# Altium PCB PCB_EMG_SN.PcbDoc
Units mm, origin at the board's own origin, x right, y up, seen from the top; angles counter-clockwise.
Board outline 44.83 x 25.53 mm, 2 copper layers (Top Layer, Bottom Layer); 67 components, 83 nets, 360 pads, 99 vias.
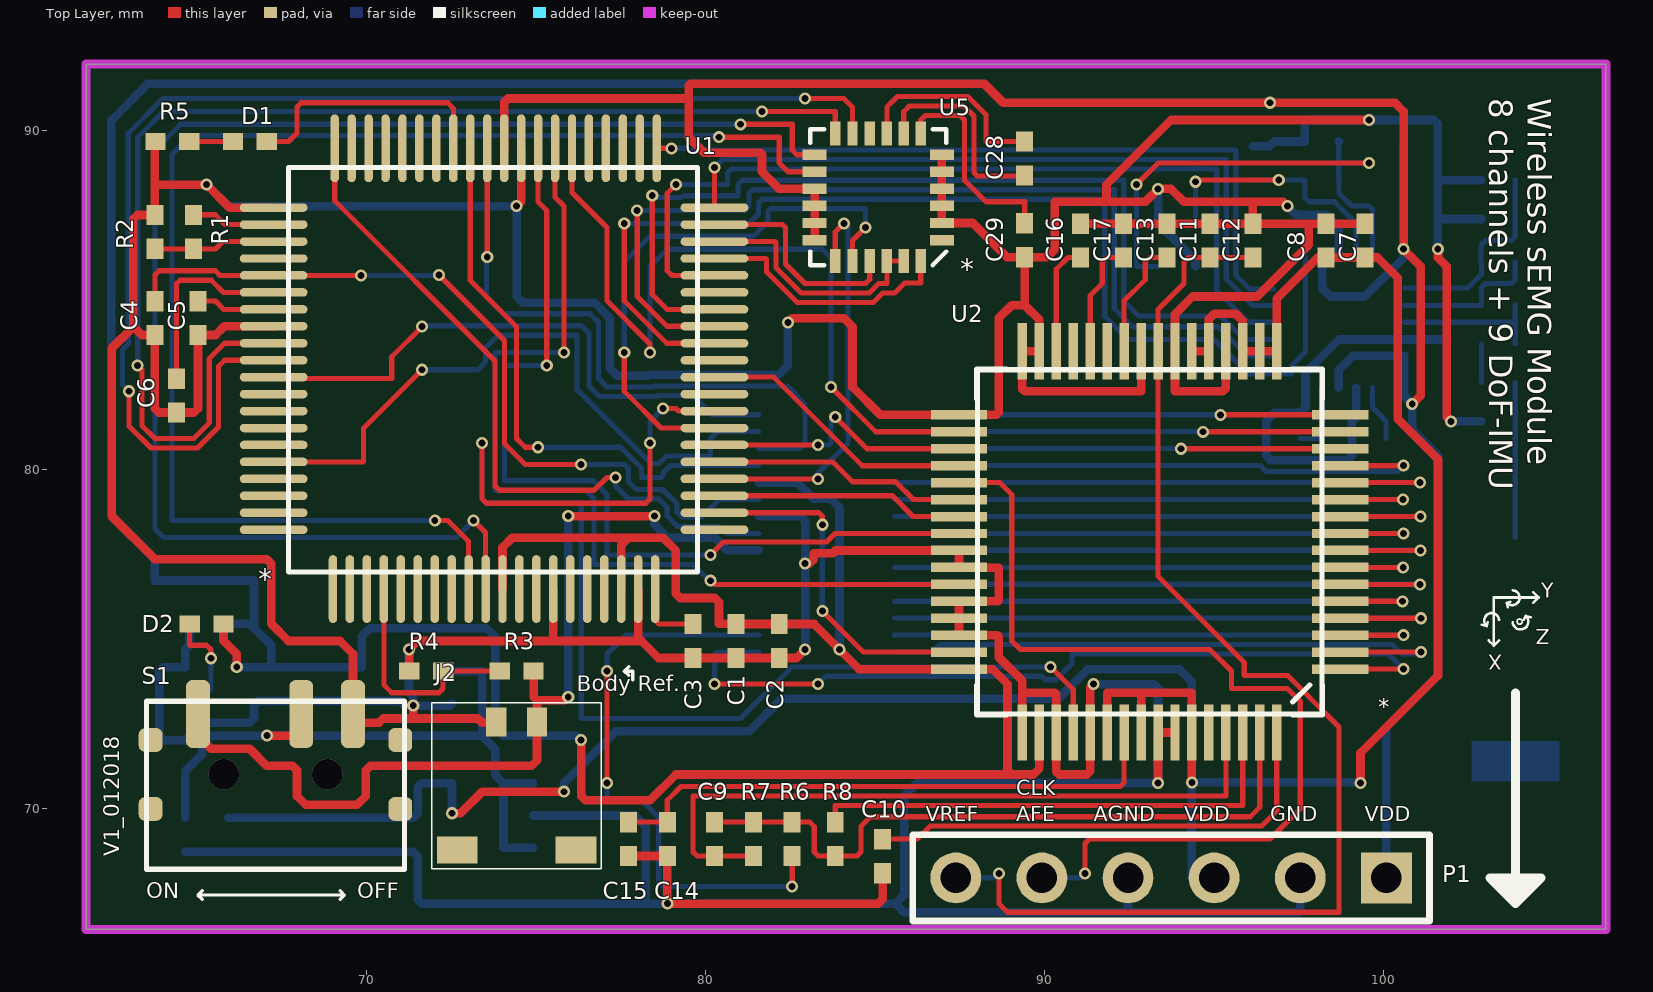
[diagram p0: Top Layer view]
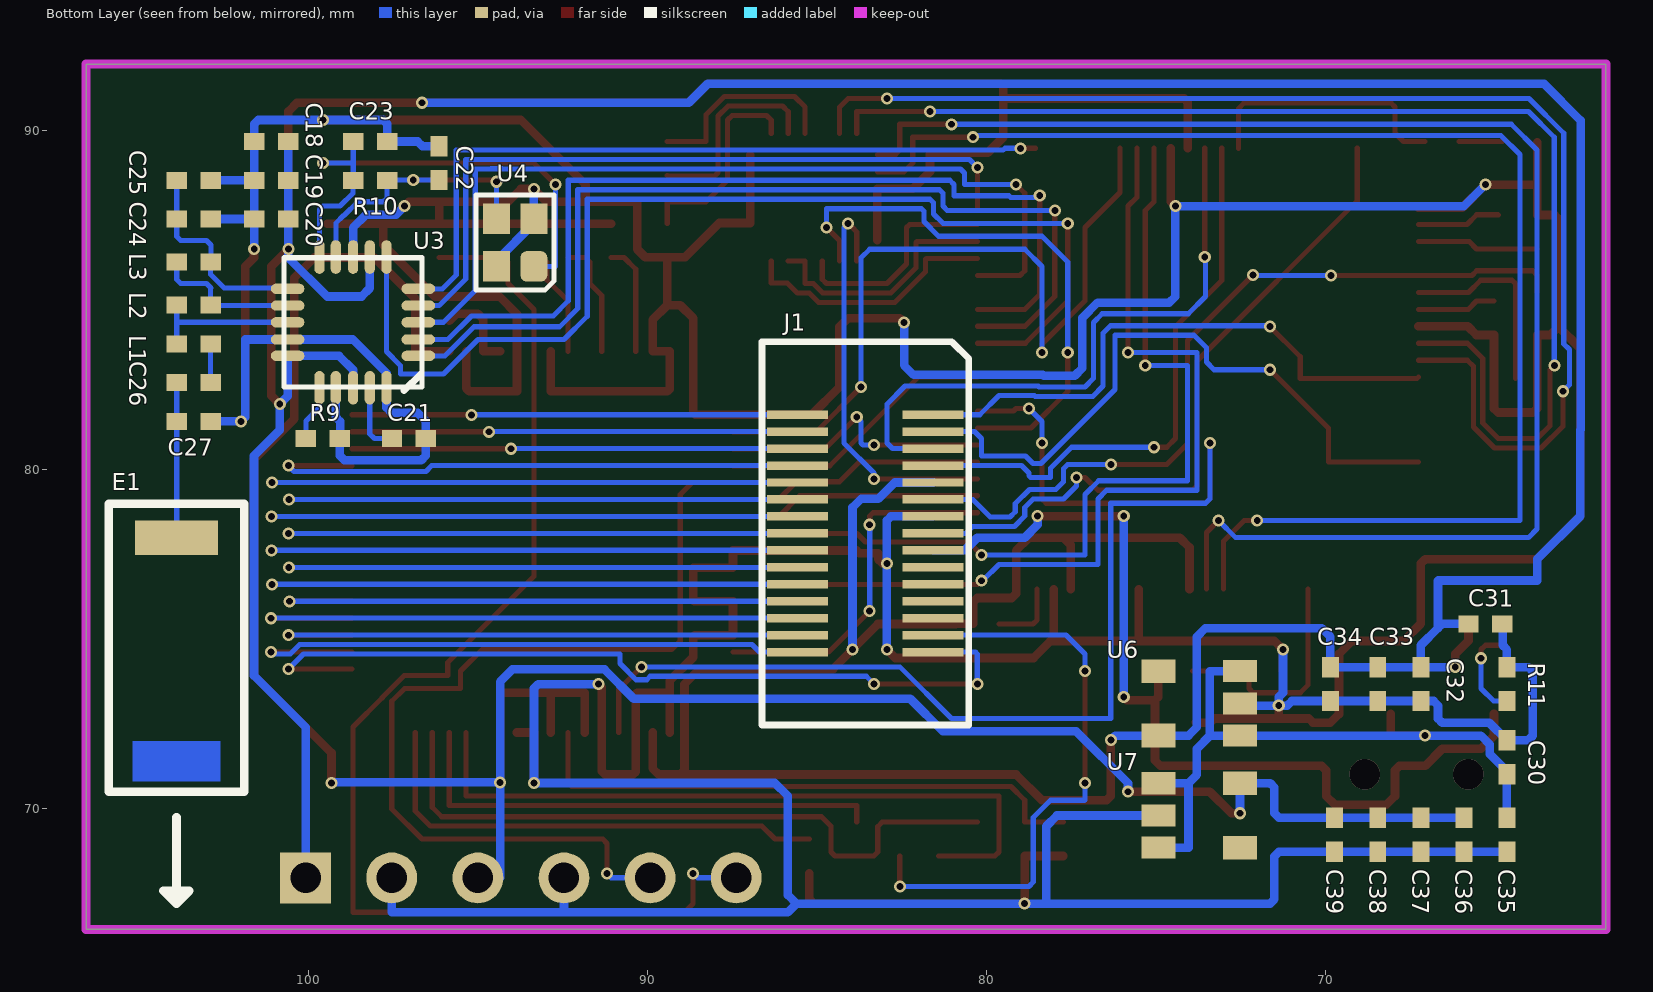
[diagram p1: Bottom Layer view, seen from below]

## Layer stack, top to bottom
Top Solder: solder mask 0.0102, Solder Resist, Dk 3.5
Top Layer: signal copper 0.0356
Dielectric 1: dielectric 0.32, FR-4, Dk 4.8
Bottom Layer: signal copper 0.0356
Bottom Solder: solder mask 0.0102, Solder Resist, Dk 3.5

## Board outline
61.722,66.421 61.722,91.948 106.553,91.948 106.553,66.421

## Design rules (kind name [scope] priority, off if disabled: settings)
Clearance [All] p1: gap=0.127
PolygonConnect [All] p1: connectstyle=Relief reliefconductorwidth=0.254 reliefentries=4 polygonreliefangle="90 Angle" airgapwidth=0.254
RoutingVias [All] p1: holewidth=0.203 width=0.356 viastyle="Through Hole" minholewidth=0.203 minwidth=0.356 maxholewidth=0.203 maxwidth=0.356
SolderMaskExpansion [All] p1: expansion=0.102
Width [All] p1: maxlimit=0.254 minlimit=0.152 preferedwidth=0.152
30 further rules are at their usual default settings.

## Classes and differential pairs
component class AFE_ADS1298: C7 C8 C9 C10 C11 C12 C13 C14 C15 C16 C17 P1 R6 R7 R8 U2
component class LSM9DS0: C28 C29 U5
component class MCU_MSP430F5529IPN: C1 C2 C3 C4 C5 C6 D1 J1 R1 R2 R3 R4 R5 U1
component class nRF24L01: C18 C19 C20 C21 C22 C23 C24 C25 C26 C27 E1 L1 L2 L3 R9 R10 U3 U4
component class PMU: C30 C31 C32 C33 C34 C35 C36 C37 C38 C39 D2 J2 R11 S1 U6 U7

## Components (designator, comment, footprint, x,y, rotation, side; value= is the part's Value field where it differs from the comment)
C1 "Cap Semi" 0402 80.899,74.93 r270 top
C2 "Cap Semi" 0402 82.169,74.93 r270 top
C3 "Cap Semi" 0402 79.629,74.93 r270 top
C4 "Cap Semi" 0402 63.754,84.455 r270 top
C5 "Cap Semi" 0402 65.024,84.455 r90 top
C6 "Cap Semi" 0402 64.389,82.169 r90 top
C7 "Cap" 0402 99.441,86.741 r270 top
C8 "Cap" 0402 98.298,86.741 r270 top
C9 "Cap" 0402 80.264,69.088 r90 top
C10 "Cap" 0402 85.217,68.58 r270 top
C11 "Cap" 0402 94.869,86.741 r270 top
C12 "" 0402 96.139,86.741 r270 top
C13 "Cap" 0402 93.599,86.741 r90 top
C14 "Cap" 0402 78.867,69.088 r270 top
C15 "Cap" 0402 77.724,69.088 r270 top
C16 "Cap" 0402 91.059,86.741 r90 top
C17 "Cap" 0402 92.329,86.741 r90 top
C18 "" 0402 101.092,89.662 r180 bottom
C19 "" 0402 101.092,88.519 r180 bottom
C20 "" 0402 101.092,87.376 r180 bottom
C21 "" 0402 97.028,80.899 r0 bottom
C22 "" 0402 96.139,89.027 r270 bottom
C23 "" 0402 98.171,89.662 r0 bottom
C24 "" 0402 103.378,87.376 r0 bottom
C25 "" 0402 103.378,88.519 r0 bottom
C26 "" 0402 103.378,82.55 r180 bottom
C27 "" 0402 103.378,81.407 r180 bottom
C28 "Cap Semi" 0402 89.408,89.162 r270 top
C29 "Cap Semi" 0402 89.408,86.749 r90 top
C30 "Cap Semi" 0402 64.643,71.501 r270 bottom
C31 "Cap Semi" 0402 65.278,75.438 r0 bottom
C32 "Cap Semi" 0402 67.183,73.66 r90 bottom
C33 "Cap Semi" 0402 68.453,73.66 r90 bottom
C34 "Cap Semi" 0402 69.85,73.66 r90 bottom
C35 "Cap Semi" 0402 64.643,69.215 r90 bottom
C36 "Cap Semi" 0402 65.913,69.215 r90 bottom
C37 "Cap Semi" 0402 67.183,69.215 r90 bottom
C38 "Cap Semi" 0402 68.453,69.215 r90 bottom
C39 "Cap Semi" 0402 69.723,69.215 r90 bottom
D1 "" 0402 66.556,89.662 r180 top
D2 "" 0402 65.278,75.438 r180 top
E1 "" ANT-2.45-CHP-B 103.886,77.978 r270 bottom
J1 "PLUG" "Molex 0529910308" 83.566,78.105 r270 bottom
J2 "WM4459CT-ND" WM4459CT-ND 74.422,70.485 r180 top
L1 "" 0402 103.378,83.693 r180 bottom
L2 "" 0402 103.378,84.836 r0 bottom
L3 "" 0402 103.378,86.106 r180 bottom
P1 "Header 6" HDR1X6 100.076,67.945 r180 top
R1 "" 0402 64.897,86.995 r90 top
R2 "" 0402 63.754,86.995 r90 top
R3 "" 0402 74.422,74.041 r0 top
R4 "" 0402 71.755,74.041 r0 top
R5 "" 0402 64.27,89.662 r180 top
R6 "Res1" 0402 82.55,69.088 r270 top
R7 "Res1" 0402 81.407,69.088 r270 top
R8 "Res1" 0402 83.82,69.088 r270 top
R9 "" 0402 99.568,80.899 r0 bottom
R10 "" 0402 98.171,88.519 r180 bottom
R11 "" 0402 64.643,73.66 r90 bottom
S1 "SWITCH" CUS-12B 67.31,68.199 r0 top
U1 "MSP430F5529" 80-LQFP 79.756,76.962 r90 top
U2 "ADS1298TQFP" 64TQFP 93.091,77.851 r180 top
U3 "nRF24L01p" Component_nRF 98.679,84.328 r90 bottom
U4 "16MHz XTAL" 8Y-16.000MAAV-T 93.345,85.979 r90 bottom
U5 "Component_1" PCBComponent_1 85.09,88.019 r90 top
U6 "Reg 3.3V" TSOP-5ll 74.922,74.041 r270 bottom
U7 "Reg 3.3V" TSOP-5ll 72.517,68.834 r90 bottom

## Footprints (in the part's own frame and the unit in brackets; to place one, negate y for a bottom-side part, rotate by r counter-clockwise, add the part's x,y. Pads: shape width x height; smd on the part's side, far side on the other; paste and mask are expansions set on the pad)
8Y-16.000MAAV-T [mm] "SMD Crystal"
  rrect50% 0.9x0.8 smd: 1(0,0)
  rect 0.9x0.8 smd: 2(1.4,0) 3(1.4,1.1) 4(0,1.1)
  silkscreen extent -0.7,-0.6 2.1,1.7
64TQFP [mil] "ADS129X-4-6-8"
  rect 65.5x11 smd: 1(-221.25,147.64) 2(-221.25,127.95) 3(-221.25,108.27) 4(-221.25,88.58) 5(-221.25,68.9) 6(-221.25,49.21) 7(-221.25,29.53) 8(-221.25,9.84) 9(-221.25,-9.84) 10(-221.25,-29.53) 11(-221.25,-49.21) 12(-221.25,-68.9) 13(-221.25,-88.58) 14(-221.25,-108.27) 15(-221.25,-127.95) 16(-221.25,-147.64) 33(221.25,-147.64) 34(221.25,-127.95) 35(221.25,-108.27) 36(221.25,-88.58) 37(221.25,-68.9) 38(221.25,-49.21) 39(221.25,-29.53) 40(221.25,-9.84) 41(221.25,9.84) 42(221.25,29.53) 43(221.25,49.21) 44(221.25,68.9) 45(221.25,88.58) 46(221.25,108.27) 47(221.25,127.95) 48(221.25,147.64)
  rect 11x65.5 smd: 17(-147.64,-221.25) 18(-127.95,-221.25) 19(-108.27,-221.25) 20(-88.58,-221.25) 21(-68.9,-221.25) 22(-49.21,-221.25) 23(-29.53,-221.25) 24(-9.84,-221.25) 25(9.84,-221.25) 26(29.53,-221.25) 27(49.21,-221.25) 28(68.9,-221.25) 29(88.58,-221.25) 30(108.27,-221.25) 31(127.95,-221.25) 32(147.64,-221.25) 49(147.64,221.25) 50(127.95,221.25) 51(108.27,221.25) 52(88.58,221.25) 53(68.9,221.25) 54(49.21,221.25) 55(29.53,221.25) 56(9.84,221.25) 57(-9.84,221.25) 58(-29.53,221.25) 59(-49.21,221.25) 60(-68.9,221.25) 61(-88.58,221.25) 62(-108.27,221.25) 63(-127.95,221.25) 64(-147.64,221.25)
  silkscreen extent -201,-201 201,201, body extent -236,-236 236,236, height 43
80-LQFP [mm] "80-LQFP (12x12)"
  oval 2x0.25 smd: 1(-0.5,10.75) 2(-0.5,10.25) 3(-0.5,9.75) 4(-0.5,9.25) 5(-0.5,8.75) 6(-0.5,8.25) 7(-0.5,7.75) 8(-0.5,7.25) 9(-0.5,6.75) 10(-0.5,6.25) 11(-0.5,5.75) 12(-0.5,5.25) 13(-0.5,4.75) 14(-0.5,4.25) 15(-0.5,3.75) 16(-0.5,3.25) 17(-0.5,2.75) 18(-0.5,2.25) 19(-0.5,1.75) 20(-0.5,1.25) 41(12.5,1.2) 42(12.5,1.7) 43(12.5,2.2) 44(12.5,2.7) 45(12.5,3.2) 46(12.5,3.7) 47(12.5,4.2) 48(12.5,4.7) 49(12.5,5.2) 50(12.5,5.7) 51(12.5,6.2) 52(12.5,6.7) 53(12.5,7.2) 54(12.5,7.7) 55(12.5,8.2) 56(12.5,8.7) 57(12.5,9.2) 58(12.5,9.7) 59(12.5,10.2) 60(12.5,10.7)
  oval 0.25x2 smd: 21(1.25,-0.5) 22(1.75,-0.5) 23(2.25,-0.5) 24(2.75,-0.5) 25(3.25,-0.5) 26(3.75,-0.5) 27(4.25,-0.5) 28(4.75,-0.5) 29(5.25,-0.5) 30(5.75,-0.5) 31(6.25,-0.5) 32(6.75,-0.5) 33(7.25,-0.5) 34(7.75,-0.5) 35(8.25,-0.5) 36(8.75,-0.5) 37(9.25,-0.5) 38(9.75,-0.5) 39(10.25,-0.5) 40(10.75,-0.5) 61(10.75,12.5) 62(10.25,12.5) 63(9.75,12.5) 64(9.25,12.5) 65(8.75,12.5) 66(8.25,12.5) 67(7.75,12.5) 68(7.25,12.5) 69(6.75,12.5) 70(6.25,12.5) 71(5.75,12.5) 72(5.25,12.5) 73(4.75,12.5) 74(4.25,12.5) 75(3.75,12.5) 76(3.25,12.5) 77(2.75,12.5) 78(2.25,12.5) 79(1.75,12.5) 80(1.25,12.5)
  body extent -0.02,0.03 11.94,11.94, height 1
0402 [mm] "Chip Capacitor, Body 1.0x0.5mm, IPC High Density"
  rect 0.6x0.5 smd: 1(-0.5,0) 2(0.5,0)
  body extent -0.55,-0.3 0.55,0.3, height 1.3
ANT-2.45-CHP-B [mm] "2.4 GHz Chip Anetnna"
  rect 1.016x2.45 smd: 1(0,0)
  Top Layer region: 5.999,1.3 7.199,1.3 7.199,-1.3 5.999,-1.3
  silkscreen extent -1,-2 7.5,2
Component_nRF [mil]
  rrect100% 12x39 smd: 1(-38.9,-75.9) 2(-19.9,-75.9) 3(0.1,-75.9) 4(19.51,-75.9) 5(38.93,-75.9) 11(38.93,75.9) 12(19.51,75.9) 13(0.1,75.9) 14(-19.9,75.9) 15(-38.9,75.9)
  rrect100% 39x12 smd: 6(75.9,-38.93) 7(75.9,-19.51) 8(75.9,-0.1) 9(75.9,19.9) 10(75.9,38.9) 16(-75.9,38.9) 17(-75.9,19.9) 18(-75.9,-0.1) 19(-75.9,-19.52) 20(-75.9,-38.93)
  silkscreen extent -79,-79 -60,-59, body extent -75,-76 75,74, height 1
CUS-12B [mm]
  rrect50% 0.7x2 smd: 1(-2.286,4.578) 2(0.762,4.578) 3(2.286,4.578)
  rrect50% 0.7x0.7 smd: ""(-3.683,1.778) ""(-3.683,3.81) ""(3.683,1.778) ""(3.683,3.81)
  body extent -3.85,0 3.85,5, height 1.4
HDR1X6 [mm] "Connector; Header; 6 Position"
  rect 1.5x1.5 hole 0.9: 1(0,0)
  round 1.5 hole 0.9: 2(2.54,0) 3(5.08,0) 4(7.62,0) 5(10.16,0) 6(12.7,0)
  silkscreen extent -1.27,-1.27 13.97,1.27
"Molex 0529910308" [mm]
  rect 0.25x1.8 smd: 1(-3.5,2) 2(-3.5,-2) 3(-3,2) 4(-3,-2) 5(-2.5,2) 6(-2.5,-2) 7(-2,2) 8(-2,-2) 9(-1.5,2) 10(-1.5,-2) 11(-1,2) 12(-1,-2) 13(-0.5,2) 14(-0.5,-2) 15(0,2) 16(0,-2) 17(0.5,2) 18(0.5,-2) 19(1,2) 20(1,-2) 21(1.5,2) 22(1.5,-2) 23(2,2) 24(2,-2) 25(2.5,2) 26(2.5,-2) 27(3,2) 28(3,-2) 29(3.5,2) 30(3.5,-2)
  silkscreen extent -5.65,-3.05 5.65,3.05, body extent -5.65,-2.7 5.65,2.7, height 2.33
PCBComponent_1 [mil]
  rect 12x28 smd: 1(-49.91,-73.91) 2(-29.91,-73.91) 3(-9.91,-73.91) 4(9.93,-73.91) 5(29.62,-73.91) 6(49.3,-73.91) 13(49.3,73.91) 14(29.62,73.91) 15(9.93,73.91) 16(-9.91,73.91) 17(-29.91,73.91) 18(-49.91,73.91)
  rect 28x12 smd: 7(73.91,-49.3) 8(73.91,-29.62) 9(73.91,-9.93) 10(73.91,9.91) 11(73.91,29.91) 12(73.91,49.91) 19(-73.91,49.91) 20(-73.91,29.91) 21(-73.91,9.91) 22(-73.91,-9.93) 23(-73.91,-29.62) 24(-73.91,-49.3)
  silkscreen extent -79,-79 79,79, body extent -85,-85 75,85, height 1
TSOP-5ll [mm] "TSOP-5 package"
  rect 0.65x1 smd: 1(1.9,2.4) 2(0.95,2.4) 3(0,2.4)
  rect 0.7x1 smd: 4(0,0) 5(1.9,0)
WM4459CT-ND [mm] "Holder"
  rect 0.6x0.85 smd mask+0.08: 1(-0.6,-2.052) 2(0.6,-2.052)
  rect 1.2x0.8 smd mask+0.08: ""(-1.75,1.723) ""(1.75,1.723)
  silkscreen extent -2.5,-2.63 2.5,2.27, body extent -2.1,-2.28 2.1,2.25, height 1.45

## Part data
C1 C2 C3 C4 C5 C6 C28 C29 C30 C31 C32 C33 C34 C35 C36 C37 C38 C39: "Capacitor (Semiconductor SIM Model)"
C7 C8 C9 C10 C11 C13 C14 C15 C16 C17: "Capacitor"
C12 C18 C19 C20 C21 C22 C23 C24 C25 C26 C27: library part "Cap Semi", "Capacitor (Semiconductor SIM Model)"
D1 D2: library part LED3, "Typical BLUE SiC LED"
E1: library part Antenna, "Generic Antenna"
J1: library part "Molex 529910308"
L1 L2 L3: library part Inductor, "Inductor"
P1: "Header, 6-Pin"
R1 R2 R3 R4 R5 R9 R10 R11: library part "Res Semi", "Semiconductor Resistor"
R6 R7 R8: "Resistor"
S1: library part Component_1
U1: "IC MCU 16BIT 128KB FLASH 80LQFP"
U2: library part ADS1298_PAG_64, "Imported"
U3: library part Component_nRF
U4: library part 8Y-16.000MAAV-T, "SMD 16 MHz XTAL"
U6 U7: library part NCP603SN330T1G, "IC REG LDO 3.3V 0.3A 5TSOP"

## Via types
v1: diameter 0.356, hole 0.203, Top Layer to Bottom Layer, 97 vias
v2: diameter 0.9, hole 0.9, Top Layer to Bottom Layer, 2 vias

## Nets (pads, with @x,y where several pads share a name; then routed paths per layer and width w, separated by ;. In a path a pad name is that pad's centre, name@x,y a point inside that pad or via, vN(x,y) a via of type N, cw(c..) or ccw(c..) an arc to the next point about the centre after c; other vN are vias at no path point)
5V: C4.1 J1.11 U1.65 | length 23.7
  Top Layer w0.152: C4.1@63.754,85.209 63.754,85.725 63.881,85.852 65.532,85.852 65.672,85.712 U1.65 v1(69.837,85.712) ; v1(72.136,85.725) 74.066,83.795 74.066,80.747 74.676,80.137 v1(76.327,80.137)
  Bottom Layer w0.152: v1(69.837,85.712) v1@72.123,85.712 ; v1(76.327,80.137) 77.597,80.137 77.724,80.01 77.724,79.629 77.953,79.4 78.729,79.4 79.146,78.983 79.146,78.74 79.299,78.588 79.883,78.588 80.4,79.105 J1.11
AGND: C1.2 C2.2 C3.2 C4.2 C5.1 C6.1 C7.1 C8.1 C10.2 C11.1 C12.1 C13.2 C14.2 C15.2 C16.2 C17.2 C18.1 C19.1 C20.1 C21.1 C22.1 C23.1 C24.1 C25.1 C27.2 C29.1 C30.1 C31.1 C32.1 C33.1 C34.1 C35.1 C36.1 C37.1 C38.1 C39.1 J1.13 J2.2 P1.2 P1.4 R2.2 R4.1 R5.2 R9.1 R11.2 S1.3 U1.14 U1.19 U1.49 U1.61 U1.68 U2.20 U2.23 U2.25 U2.31 U2.32 U2.33 U2.41 U2.42 U2.44 U2.45 U2.46 U2.49 U2.51 U2.53 U2.57 U2.58 U3.8 U3.14 U3.17 U3.20 U4.2 U4.4 U5.2 U5.3 U5.4 U5.5 U5.6 U6.2 U7.2 | length 295.8
  Top Layer w0.254: R5.2@63.754,89.646 63.754,88.392 ; U1.68 65.797,84.212 65.54,83.955 C5.1 65.024,81.788 64.905,81.669 C6.1 63.873,81.669 63.754,81.788 C4.2 63.365,83.955 63.119,84.201 ; U1.61 65.958,87.712 v1(65.278,88.392) 63.754,88.392 ; R4.1 71.255,74.684 71.501,74.93 77.978,74.93 ; v1(71.374,73.025) 71.374,72.644 ; J2.2 73.802,72.517 73.406,72.517 73.279,72.644 71.374,72.644 ; v1(74.422,87.757) 74.556,87.891 U1.49 ; 75.506,74.93 U1.14 ; C15.2 C14.2 v1@78.867,67.31 ; U1.19 78.006,74.958 77.978,74.93 ; v1@78.994,67.183 85.09,67.183 85.217,67.31 C10.2 ; v1(82.423,84.328) 82.55,84.455 84.074,84.455 84.328,84.201 84.328,82.423 85.15,81.601 U2.33 88.579,81.601 88.646,81.668 88.646,84.455 89.027,84.836 89.408,84.836 ; v1(82.931,74.676) 82.685,74.43 C2.2 C1.2 C3.2 78.605,74.43 78.105,74.93 77.978,74.93 ; v1(82.931,77.216) 83.058,77.216 83.185,77.343 83.185,77.521 83.744,77.521 83.824,77.601 U2.41 U2.42 87.483,77.089 88.646,77.089 88.646,76.129 88.618,76.101 U2.44 U2.45 U2.46 88.602,75.101 88.646,75.057 88.646,74.453 89.341,73.758 89.341,73.339 ; U5.6 U5.5 U5.4 U5.3 U5.2 87.874,87.259 88.884,86.249 C29.1 ; U2.49 89.341,73.339 ; C16.2 C17.2 C13.2 C12.1 ; v1(91.44,73.66) 91.341,73.561 U2.53 91.341,71.092 91.242,70.993 90.424,70.993 90.341,71.076 U2.51 90.341,73.362 90.297,73.406 89.408,73.406 89.341,73.339 ; U2.25 92.841,82.296 89.408,82.296 89.341,82.363 U2.32 U2.31 89.841,84.403 89.408,84.836 ; v1(93.341,70.743) U2.57 U2.58 ; U2.20 95.341,82.387 95.25,82.296 93.841,82.296 U2.23 93.841,84.57 94.361,85.09 96.266,85.09 97.79,86.614 97.79,87.241 ; 96.139,87.884 C12.1 ; v1(97.155,87.757) 97.028,87.884 94.107,87.884 93.726,88.265 v1(93.345,88.265) 92.964,87.884 91.821,87.884 ; C7.1 C8.1 97.79,87.241 ; v1(99.568,90.297) 93.726,90.297 91.821,88.392 91.821,87.884 ; v1(101.592,86.495) 101.6,86.487 101.6,86.233 101.854,85.979 101.854,81.534 v1(101.981,81.407) ; 63.119,84.201 63.119,87.376 63.238,87.495 R2.2 63.754,88.392 ; 63.119,84.201 62.484,83.566 62.484,78.613 63.754,77.343 67.056,77.343 67.183,77.216 67.183,75.438 67.691,74.93 69.215,74.93 69.596,74.549 S1.3 69.85,72.523 70.364,72.523 70.485,72.644 71.374,72.644 ; 89.408,84.836 C29.1 ; C29.1 90.059,86.249 90.297,86.487 90.297,87.884 91.821,87.884 ; C12.1 97.79,87.241
  Bottom Layer w0.254: C35.1 C36.1 C37.1 C38.1 C39.1 71.366,68.715 71.501,68.58 71.501,67.31 71.628,67.183 78.232,67.183 ; C31.1@64.77,75.43 64.77,74.803 64.643,74.676 R11.2 64,74.16 63.881,74.041 63.881,72.136 64.016,72.001 C30.1 65.164,72.522 66.553,72.522 66.675,72.644 66.675,73.025 66.81,73.16 C32.1 C33.1 C34.1 70.985,73.16 71.12,73.025 v1(71.374,73.025) ; v1(65.278,88.392) 65.913,87.757 v1(74.422,87.757) 74.422,85.09 74.6,84.912 76.718,84.912 77.165,84.465 77.165,82.982 77.394,82.753 78.304,82.753 78.33,82.779 82.144,82.779 82.423,83.058 v1(82.423,84.328) ; v1(71.247,74.676) 71.247,73.406 71.374,73.279 v1(71.374,73.025) ; U6.2 72.456,73.025 v1(71.374,73.025) ; U7.2 77.917,69.784 78.232,69.469 78.232,67.183 ; J1.13 82.812,78.605 82.931,78.486 v1(82.931,77.216) v1(82.931,74.676) ; v1(91.44,73.66) 93.218,73.66 93.341,73.537 v1(93.341,70.743) 86.237,70.743 85.852,70.358 85.852,67.437 85.598,67.183 ; P1.4 92.456,66.929 ; v1(93.345,88.265) U4.2 93.345,87.249 94.445,86.149 U4.4 ; C22.1 96.639,89.527 96.774,89.662 C23.1 97.671,90.178 97.79,90.297 101.473,90.297 101.592,90.178 C18.1 C19.1 ; v1(97.155,87.757) 97.409,87.503 98.298,87.503 98.677,87.124 U3.8 ; P1.2 97.536,66.929 92.456,66.929 ; R9.1@99.06,80.907 99.06,81.407 99.185,81.532 U3.17 ; R9.1 99.068,80.399 98.933,80.264 96.663,80.264 96.528,80.399 C21.1 96.528,81.415 96.774,81.661 97.536,81.661 97.69,81.815 U3.20 97.69,82.831 98.682,83.823 U3.14 101.851,83.823 101.854,83.82 101.854,81.534 v1(101.981,81.407) C27.2 ; v1(101.592,86.495) C20.1 ; C24.1 C20.1 ; C25.1 C19.1 ; 78.232,67.183 v1(78.867,67.183) 85.598,67.183 ; 85.598,67.183 85.852,66.929 92.456,66.929 ; C20.1 C19.1
AVDD: C7.2 C8.2 C36.2 C37.2 C38.2 C39.2 P1.3 U2.17 U2.18 U2.19 U2.21 U2.22 U2.54 U2.56 U2.59 U7.5 | length 76.8
  Top Layer w0.254: v1(72.517,69.85) 72.771,69.85 73.406,70.485 v1(75.819,70.485) ; U2.54 91.841,73.406 94.341,73.406 U2.59 v1(94.341,70.759) ; U2.56 92.841,73.275 ; U2.22 U2.21 94.841,84.427 94.996,84.582 95.631,84.582 95.841,84.372 ; U2.19 U2.18 U2.17 96.841,85.03 98.044,86.233 98.29,86.233 C8.2 C7.2 99.814,86.241 100.406,85.649 100.406,81.483 101.6,80.289 101.6,73.914 99.314,71.628 v1(99.314,70.739)
  Bottom Layer w0.254: C36.2 C37.2 C38.2 C39.2 71.366,69.715 71.501,69.85 71.501,70.612 71.623,70.734 U7.5 v1(72.517,69.85) ; v1(75.819,70.485) 75.819,70.739 77.343,72.263 81.28,72.263 82.245,73.228 90.398,73.228 91.261,74.092 93.98,74.092 94.341,73.731 v1(94.341,70.759) ; P1.3 94.341,67.945 v1(94.341,70.759) ; v1@99.294,70.759 v1(94.341,70.759)
BAT_LEVEL: R3.1 R4.2 U1.4 | length 6.9
  Top Layer w0.152: U1.4 70.506,73.639 70.739,73.406 72.136,73.406 72.255,73.525 R4.2 R3.1
CLK_AFE: P1.5 U2.37 | length 27.7
  Top Layer w0.152: U2.37 88.674,79.601 89.027,79.248 89.027,74.93 89.281,74.676 94.869,74.676 95.504,74.041 95.504,73.533 97.155,73.533 97.536,73.152 97.536,69.977 96.647,69.088 91.313,69.088 91.186,68.961 v1(91.186,68.072)
  Bottom Layer w0.152: P1.5 91.059,67.945 v1(91.186,68.072)
GRN_LED: D1.1 U1.53 | length 7.7
  Top Layer w0.152: D1.1 67.691,89.662 67.945,89.916 67.945,90.678 68.072,90.805 72.39,90.805 72.556,90.639 U1.53
IN1N: J1.4 U2.15 | length 13.1
  Top Layer w0.152: v1(94.667,81.101) U2.15
  Bottom Layer w0.152: J1.4 v1@94.663,81.105
IN1P: J1.2 U2.16 | length 13.2
  Top Layer w0.152: v1(95.183,81.601) U2.16
  Bottom Layer w0.152: J1.2@85.566,81.549 J1.2 95.179,81.605 v1(95.183,81.601)
IN2N: J1.8 U2.13 | length 17
  Top Layer w0.152: U2.13 v1(100.584,80.101)
  Bottom Layer w0.152: J1.8 96.355,80.105 96.526,79.934 100.417,79.934 v1(100.584,80.101)
IN2P: J1.6 U2.14 | length 13.1
  Top Layer w0.152: v1(94.024,80.601) U2.14
  Bottom Layer w0.152: J1.6 v1@94.02,80.605
IN3N: J1.12 U2.11 | length 16.8
  Top Layer w0.152: U2.11 v1(100.564,79.101)
  Bottom Layer w0.152: J1.12@85.57,79.101 v1(100.564,79.101)
IN3P: J1.10 U2.12 | length 17.8
  Top Layer w0.152: U2.12 v1(101.064,79.601)
  Bottom Layer w0.152: J1.10 v1@101.06,79.605
IN4N: J1.16 U2.9 | length 16.9
  Top Layer w0.152: U2.9 v1(100.58,78.101)
  Bottom Layer w0.152: J1.16@85.57,78.101 v1(100.58,78.101)
IN4P: J1.14 U2.10 | length 17.9
  Top Layer w0.152: U2.10 v1(101.08,78.601)
  Bottom Layer w0.152: J1.14 v1@101.076,78.605
IN5N: J1.20 U2.7 | length 16.9
  Top Layer w0.152: U2.7 v1(100.572,77.101)
  Bottom Layer w0.152: J1.20@85.57,77.101 v1(100.572,77.101)
IN5P: J1.18 U2.8 | length 17.9
  Top Layer w0.152: U2.8 v1(101.088,77.601)
  Bottom Layer w0.152: J1.18 v1@101.084,77.605
IN6N: J1.24 U2.5 | length 16.8
  Top Layer w0.152: U2.5 v1(100.556,76.101)
  Bottom Layer w0.152: J1.24@85.57,76.101 v1(100.556,76.101)
IN6P: J1.22 U2.6 | length 17.9
  Top Layer w0.152: U2.6 v1(101.072,76.601)
  Bottom Layer w0.152: J1.22 v1@101.068,76.605
IN7N: J1.28 U2.3 | length 16.9
  Top Layer w0.152: U2.3 v1(100.584,75.101)
  Bottom Layer w0.152: J1.28@85.57,75.101 85.577,75.108 100.577,75.108 v1(100.584,75.101)
IN7P: J1.26 U2.4 | length 17.9
  Top Layer w0.152: U2.4 v1(101.092,75.601)
  Bottom Layer w0.152: J1.26 v1@101.088,75.605
IN8N: J1.29 U2.1 | length 25.2
  Top Layer w0.152: v1(80.264,73.66) v1(83.312,73.66) ; U2.1 v1(100.584,74.101)
  Bottom Layer w0.152: v1(80.264,73.66) 80.264,74.549 80.32,74.605 J1.29 ; v1(83.312,73.66) 83.541,73.889 89.911,73.889 90.012,73.787 90.328,73.787 90.805,74.264 90.805,74.549 100.136,74.549 v1(100.584,74.101)
IN8P: J1.30 U2.2 | length 18.1
  Top Layer w0.152: U2.2 v1(101.092,74.601)
  Bottom Layer w0.152: J1.30 86.685,74.605 86.908,74.828 100.252,74.828 100.531,74.549 v1@101.04,74.549
MCLK_DEBUG: J1.15 U1.60 | length 20.9
  Top Layer w0.152: U1.60 69.056,87.916 73.787,83.185 73.787,79.502 73.914,79.375 76.708,79.375 77.089,79.756 v1(77.343,79.756)
  Bottom Layer w0.152: v1(77.343,79.756) 77.343,79.502 77.724,79.121 78.613,79.121 78.867,78.867 78.867,78.613 79.172,78.308 80.401,78.308 80.604,78.105 J1.15
NetC3_1: C3.1 U1.20 | length 2.1
  Top Layer w0.152: U1.20 78.506,75.545 78.621,75.43 C3.1
NetC5_2: C5.2 U1.67 | length 2.3
  Top Layer w0.152: C5.2 65.54,84.955 65.783,84.712 U1.67
NetC6_2: C6.2 U1.66 | length 5.9
  Top Layer w0.152: C6.2 64.389,85.471 64.491,85.573 65.416,85.573 65.777,85.212 U1.66
NetC9_1: C9.1 R7.2 U2.61 | length 21.1
  Top Layer w0.152: R7.2 C9.1 79.748,68.588 79.629,68.707 79.629,70.358 95.341,70.358 U2.61
NetC9_2: C9.2 R6.1 R7.1 R8.2 U2.63 | length 20.2
  Top Layer w0.152: C9.2 83.066,69.588 83.201,69.453 83.201,68.707 83.32,68.588 R8.2 84.463,68.588 84.582,68.707 84.582,69.469 84.861,69.748 96.06,69.748 96.341,70.029 U2.63
NetC10_1: C10.1 U2.64 | length 14.3
  Top Layer w0.152: C10.1@85.217,69.088 86.233,69.088 86.614,69.469 96.393,69.469 96.841,69.917 U2.64
NetC13_1: C13.1 U2.26 | length 3.6
  Top Layer w0.152: U2.26 92.341,84.963 92.964,85.586 92.964,86.106 93.099,86.241 C13.1
NetC14_1: C14.1 C15.1 U2.55 | length 17
  Top Layer w0.152: C15.1 C14.1 78.867,70.231 79.273,70.637 92.227,70.637 92.341,70.751 U2.55
NetC16_1: C16.1 U2.30 | length 3.3
  Top Layer w0.152: U2.30 90.341,85.896 90.686,86.241 C16.1
NetC17_1: C17.1 U2.28 | length 3.5
  Top Layer w0.152: U2.28 91.341,85.118 91.694,85.471 91.694,86.106 91.829,86.241 C17.1
NetC21_2: C21.2 U3.19 | length 2.1
  Bottom Layer w0.152: C21.2 98.044,80.899 98.183,81.038 U3.19
NetC22_2: C22.2 R10.2 U3.9 U4.3 | length 8.4
  Top Layer w0.152: v1@94.496,88.527 v1(96.901,88.527)
  Bottom Layer w0.152: U4.3 v1(94.445,88.476) ; C22.2 v1(96.901,88.527) R10.2@97.663,88.527 ; R10.2 97.671,88.003 97.79,87.884 98.538,87.884 98.944,87.478 98.958,87.478 99.185,87.251 U3.9
NetC23_2: C23.2 R10.1 U3.10 U4.1 | length 15.2
  Top Layer w0.152: v1(92.71,88.392) 93.345,89.027 v1(99.568,89.027)
  Bottom Layer w0.152: v1(92.71,88.392) 92.71,85.979 U4.1 ; C23.2 98.671,89.027 ; v1(99.568,89.027) 98.671,89.027 ; U3.10 99.667,87.658 99.568,87.757 99.06,87.757 98.679,88.138 98.679,88.511 R10.1 98.671,89.027
  Bottom Layer w0.254: C23.2 C23.2@98.679,89.654
NetC24_2: C24.2 C25.2 L3.2 U3.11 | length 6
  Bottom Layer w0.152: U3.11@100.634,85.344 102.475,85.344 102.878,85.747 L3.2 102.87,86.114 102.87,86.614 102.997,86.741 103.759,86.741 103.878,86.86 C24.2 C25.2
NetC26_1: C26.1 C27.1 E1.1 | length 4.6
  Bottom Layer w0.152: E1.1@103.878,77.986 C27.1 C26.1
NetC26_2: C26.2 L1.2 | length 1.1
  Bottom Layer w0.152: C26.2 L1.2
NetC28_1: C28.1 U5.9 | length 6
  Top Layer w0.152: U5.9 85.342,90.676 85.658,90.992 87.726,90.992 88.265,90.452 88.265,89.662 C28.1
NetC28_2: C28.2 U5.8 | length 6.1
  Top Layer w0.152: U5.8 85.842,90.541 86.013,90.712 87.61,90.712 87.909,90.413 87.909,88.748 88.011,88.646 89.392,88.646 C28.2
NetC29_2: C29.2 U5.7 | length 6.3
  Top Layer w0.152: U5.7 86.342,90.297 86.478,90.433 87.494,90.433 87.63,90.297 87.63,88.519 88.265,87.884 89.408,87.884 C29.2
NetC30_2: C30.2 C35.2 S1.2 U6.1 U6.3 U7.1 U7.3 | length 20.5
  Top Layer w0.254: v1@67.061,72.136 68.072,72.136 S1.2
  Bottom Layer w0.254: C35.2 C30.2 64.643,71.092 65.147,71.596 65.147,71.878 65.41,72.141 v1(67.056,72.141) U6.1 73.411,72.141 73.406,72.146 73.406,74.041 U6.3 ; 73.406,72.136 73.787,71.755 73.787,70.983 74.036,70.734 ; U7.3 74.041,68.834 74.036,68.839 74.036,70.734 ; U7.1 74.036,70.734
NetD1_2: D1.2 R5.1 | length 1.3
  Top Layer w0.152: R5.1 D1.2
NetD2_2: D2.2 R11.1 | length 3.4
  Top Layer w0.152: D2.2 64.778,74.811 64.786,74.803 65.278,74.803 65.405,74.676 v1(65.405,74.422)
  Bottom Layer w0.152: R11.1 65.032,73.16 65.405,73.533 v1(65.405,74.422)
NetL1_1: L1.1 L2.2 U3.13 | length 4.4
  Bottom Layer w0.152: U3.13 103.875,84.331 ; L1.1 L2.2
NetL2_1: L2.1 L3.1 U3.12 | length 4.4
  Bottom Layer w0.152: U3.12 102.866,84.824 L2.1 102.878,85.336 102.87,85.344 102.997,85.471 103.759,85.471 103.878,85.59 L3.1
NetR1_1: R1.1 R2.1 U1.63 | length 3.6
  Top Layer w0.152: R2.1 R1.1 65.54,86.495 65.757,86.712 U1.63
NetR1_2: R1.2 U1.62 | length 2.5
  Top Layer w0.152: R1.2 64.905,87.503 65.532,87.503 65.823,87.212 U1.62
NetR8_1: R8.1 U2.62 | length 14.6
  Top Layer w0.152: R8.1 83.82,70.079 95.841,70.079 ; 95.841,70.111 U2.62
NetR9_2: R9.2 U3.16 | length 1.7
  Bottom Layer w0.152: U3.16 99.667,81.816 100.068,81.415 R9.2
NetU1_9: U1.9 U5.14 | length 41.2
  Top Layer w0.152: v1(72.009,78.486) 72.39,78.486 73.006,77.87 U1.9 ; v1(80.391,89.789) 82.169,89.789 82.169,89.027 82.425,88.771 U5.14
  Bottom Layer w0.152: v1(72.009,78.486) 64.262,78.486 64.262,89.281 64.824,89.843 v1@80.337,89.843
NetU1_10: U1.10 U5.13 | length 43.7
  Top Layer w0.152: v1(73.152,78.486) 73.506,78.132 U1.10 ; v1(81.026,90.17) 82.55,90.17 82.55,89.408 82.687,89.271 U5.13
  Bottom Layer w0.152: v1(73.152,78.486) 72.644,77.978 64.008,77.978 63.754,78.232 63.754,89.408 64.516,90.17 v1(81.026,90.17)
NetU1_22: U1.22 U2.47 | length 10.6
  Top Layer w0.152: U1.22 83.34,78.712 83.439,78.613 v1(83.439,78.359) ; v1(83.439,75.819) 84.657,74.601 U2.47
  Bottom Layer w0.152: v1(83.439,75.819) v1(83.439,78.359)
NetU1_23: U1.23 U2.39 | length 7.5
  Top Layer w0.152: U1.23 85.507,79.212 86.118,78.601 U2.39
NetU1_24: U1.24 U5.19 | length 12
  Top Layer w0.152: U1.24 v1(83.312,79.712) ; U5.19 83.822,86.997 83.947,87.122
  Bottom Layer w0.152: v1(83.312,79.712) 83.312,79.883 84.201,80.772 84.201,87.122 v1(84.074,87.249)
NetU1_25: U1.25 U2.38 | length 7.7
  Top Layer w0.152: U1.25 83.745,80.212 84.328,79.629 85.598,79.629 86.126,79.101 U2.38
NetU1_26: U1.26 U2.35 | length 8.3
  Top Layer w0.152: U1.26 v1(83.312,80.712) ; v1(83.82,81.534) 84.753,80.601 U2.35
  Bottom Layer w0.152: v1(83.312,80.712) 83.633,80.712 83.693,80.772 83.693,81.407 v1(83.82,81.534)
NetU1_27: U1.27 U5.20 | length 16.6
  Top Layer w0.152: v1(77.597,83.439) 77.597,82.296 78.681,81.212 U1.27 ; U5.20 84.33,86.743 v1(84.709,87.122)
  Bottom Layer w0.152: v1(77.597,83.439) 77.597,86.106 78.359,86.868 81.407,86.868 81.839,87.3 81.839,87.605 81.915,87.681 84.709,87.681 v1(84.709,87.122)
NetU1_28: U1.28 U2.52 | length 38.7
  Top Layer w0.152: v1(73.406,80.772) 73.406,79.121 73.533,78.994 78.232,78.994 78.359,79.121 v1(78.359,80.772) ; v1(78.74,81.788) 79.121,81.788 79.197,81.712 U1.28 ; v1(90.17,74.168) 90.841,73.497 U2.52
  Bottom Layer w0.152: v1(73.406,80.772) 73.406,79.121 73.533,78.994 76.327,78.994 76.327,72.644 81.026,72.644 82.55,74.168 v1(90.17,74.168) ; v1(78.359,80.772) 78.359,81.407 v1(78.74,81.788)
NetU1_30: U1.30 U2.36 | length 8.3
  Top Layer w0.152: U1.30 82.007,82.712 84.618,80.101 U2.36
NetU1_32: U1.32 U3.6 | length 33.4
  Top Layer w0.152: v1(77.597,87.249) 77.597,84.963 78.848,83.712 U1.32
  Bottom Layer w0.152: v1(77.597,87.249) 81.28,87.249 81.559,87.528 81.559,87.859 81.661,87.96 91.77,87.96 91.77,84.506 92.456,83.82 94.996,83.82 96.012,82.804 97.282,82.804 97.282,83.058 97.69,83.466 U3.6
NetU1_33: U1.33 U3.1 | length 28.5
  Top Layer w0.152: v1(77.978,87.63) 77.978,85.09 78.856,84.212 U1.33
  Bottom Layer w0.152: v1(77.978,87.63) 81.153,87.63 81.28,87.757 81.28,88.138 81.382,88.24 92.05,88.24 92.05,84.734 92.583,84.201 95.109,84.201 95.97,83.34 U3.1
NetU1_34: U1.34 U3.2 | length 27.7
  Top Layer w0.152: v1(78.422,88.075) 78.422,85.153 78.864,84.712 U1.34
  Bottom Layer w0.152: v1(78.422,88.075) 78.486,88.011 79.279,88.011 79.33,88.062 80.95,88.062 80.95,88.392 81.077,88.519 92.329,88.519 92.329,84.963 92.773,84.519 95.186,84.519 95.882,83.823 U3.2
NetU1_36: U1.36 U3.3 | length 26.1
  Top Layer w0.152: v1(79.121,88.392) 78.867,88.138 78.867,85.852 79.007,85.712 U1.36
  Bottom Layer w0.152: v1(79.121,88.392) 80.645,88.392 80.645,88.73 80.764,88.849 94.279,88.849 94.287,88.857 94.603,88.857 94.611,88.849 95.072,88.849 95.072,85.268 96.009,84.331 U3.3
NetU1_37: U1.37 U5.24 | length 7.7
  Top Layer w0.152: U1.37 81.767,86.212 81.79,86.189 81.79,85.822 82.7,84.912 84.94,84.912 85.22,85.192 85.573,85.192 85.87,85.489 86.342,85.489 U5.24
NetU1_38: U1.38 U5.22 U5.23 | length 7.4
  Top Layer w0.152: U1.38 82.041,86.712 82.07,86.683 82.07,85.937 82.815,85.192 84.825,85.192 85.104,85.471 85.344,85.471 85.344,86.14 U5.22 U5.23
NetU1_39: U1.39 U5.21 | length 6.5
  Top Layer w0.152: U1.39 82.259,87.212 82.349,87.122 82.349,86.053 82.931,85.471 84.709,85.471 84.838,85.6 U5.21
NetU1_40: U1.40 U3.4 | length 21.6
  Top Layer w0.152: U1.40 v1@80.256,88.892
  Bottom Layer w0.152: v1(80.264,88.9) 80.493,89.129 94.164,89.129 94.171,89.136 94.719,89.136 94.726,89.129 95.352,89.129 95.352,85.609 96.137,84.824 U3.4
NetU1_41: U1.41 U3.5 | length 22
  Top Layer w0.152: U1.41 v1(78.994,89.462)
  Bottom Layer w0.152: v1(78.994,89.462) 79.448,89.462 ; 79.477,89.433 79.502,89.408 94.048,89.408 94.056,89.416 94.834,89.416 94.842,89.408 95.631,89.408 95.631,85.725 96.039,85.317 U3.5
NetU1_46: U1.46 U2.34 | length 23.3
  Top Layer w0.152: U1.46 76.056,88.155 77.089,87.122 77.089,84.963 78.359,83.693 v1(78.359,83.439) ; v1(83.693,82.423) 85.015,81.101 U2.34
  Bottom Layer w0.152: v1(78.359,83.439) 78.359,85.979 78.867,86.487 83.439,86.487 83.693,86.233 v1(83.693,82.423)
NetU1_47: U1.47 U2.43 | length 28.2
  Top Layer w0.152: U1.47 75.556,88.02 75.819,87.757 v1(75.819,83.439) ; v1(80.137,76.708) 80.244,76.601 U2.43
  Bottom Layer w0.152: v1(75.819,83.439) 73.787,83.439 73.787,79.375 76.454,79.375 76.708,79.121 76.708,77.191 79.629,77.191 80.112,76.708 v1(80.137,76.708)
NetU1_48: U1.48 U2.40 | length 26.8
  Top Layer w0.152: U1.48 75.056,87.885 75.311,87.63 v1(75.311,83.058) ; v1(80.137,77.47) 80.518,77.851 83.566,77.851 83.816,78.101 U2.40
  Bottom Layer w0.152: v1(75.311,83.058) 74.066,83.058 74.066,79.654 76.683,79.654 77.089,79.248 77.089,77.47 v1(80.137,77.47)
NetU1_69: U1.69 U5.12 | length 36.4
  Top Layer w0.152: v1(63.246,83.058) 63.373,82.931 63.373,81.28 63.754,80.899 64.897,80.899 65.354,81.356 65.354,83.261 65.805,83.712 U1.69 ; v1(81.661,90.551) 83.82,90.551 83.822,90.549 U5.12
  Bottom Layer w0.152: v1(63.246,83.058) 63.246,89.789 64.008,90.551 v1(81.661,90.551)
NetU1_70: U1.70 U5.11 | length 38.1
  Top Layer w0.152: v1(62.992,82.296) 62.992,81.266 63.638,80.62 65.013,80.62 65.634,81.24 65.634,83.033 65.813,83.212 U1.70 ; v1(82.931,90.932) 84.074,90.932 84.33,90.676 U5.11
  Bottom Layer w0.152: v1(62.992,82.296) 62.801,82.486 62.801,83.528 62.967,83.693 62.967,89.905 63.994,90.932 v1(82.931,90.932)
RLD: J1.27 R6.2 | length 17.5
  Top Layer w0.152: v1(77.089,70.739) v1(77.089,74.041) ; v1(82.55,67.691) R6.2
  Bottom Layer w0.152: v1(77.089,70.739) 77.089,70.241 77.099,70.231 78.105,70.231 78.613,69.723 78.613,67.818 78.74,67.691 v1(82.55,67.691) ; v1(77.089,74.041) 77.089,74.549 77.645,75.105 J1.27
RST: J1.3 U1.76 | length 19.9
  Top Layer w0.152: U1.76 69.902,80.212 69.902,81.205 v1(71.628,82.931)
  Bottom Layer w0.152: v1(71.628,82.931) 73.279,82.931 73.508,83.16 73.508,83.58 73.874,83.947 76.2,83.947 76.2,82.347 78.384,80.162 78.624,80.162 78.846,80.384 80.137,80.384 80.137,80.899 80.343,81.105 J1.3
RXD: J1.7 U1.52 | length 17.1
  Top Layer w0.152: U1.52 73.056,85.567 74.422,84.201 74.422,80.899 74.676,80.645 v1(75.057,80.645)
  Bottom Layer w0.152: v1(75.057,80.645) 77.484,80.645 78.105,80.024 78.105,79.756 78.689,79.756 78.74,79.807 78.74,79.883 78.962,80.105 J1.7
TEST: J1.1 U1.71 | length 17.4
  Top Layer w0.152: U1.71 67.291,82.677 70.739,82.677 70.739,83.312 v1(71.628,84.201)
  Bottom Layer w0.152: v1(71.628,84.201) 71.653,84.226 76.338,84.226 76.556,84.009 76.556,82.448 76.86,82.144 78.557,82.144 78.582,82.169 79.629,82.169 80.193,81.605 J1.1
TXD: J1.5 U1.51 | length 18.7
  Top Layer w0.152: v1(73.556,86.256) U1.51
  Bottom Layer w0.152: v1(73.556,86.256) 73.533,86.233 73.533,85.09 74.041,84.582 76.581,84.582 76.835,84.328 76.835,82.677 77.089,82.423 78.441,82.423 78.466,82.448 82.398,82.448 82.931,81.915 82.931,80.772 82.764,80.605 J1.5
VBAT: J1.17 J2.1 R3.2 S1.1 | length 28.1
  Top Layer w0.254: S1.1 65.024,72.136 65.405,71.755 66.548,71.755 67.056,71.247 67.818,71.247 67.945,71.12 67.945,70.358 68.199,70.104 69.723,70.104 69.977,70.358 69.977,71.12 70.104,71.247 74.86,71.247 75.022,71.409 J2.1 75.022,73.187 ; R3.2 74.93,74.033 74.93,73.279 75.022,73.187 ; v1(75.946,73.279) 75.854,73.187 75.022,73.187 ; v1(75.946,78.613) v1(78.486,78.613)
  Bottom Layer w0.254: v1(75.946,73.279) v1(75.946,78.613) ; v1(78.486,78.613) 78.486,78.359 78.867,77.978 80.264,77.978 80.637,77.605 J1.17
VDD: C1.1 C2.1 C18.2 C19.2 C20.2 C31.2 C32.2 C33.2 C34.2 D2.1 J1.9 P1.1 U1.11 U1.18 U1.50 U2.48 U2.50 U3.7 U3.15 U3.18 U5.15 U5.16 U5.17 U5.18 U6.5 | length 189.5
  Top Layer w0.254: D2.1 65.778,74.938 66.167,74.549 v1(66.167,74.168) ; U1.11 74.006,77.689 74.295,77.978 77.724,77.978 ; U1.50 74.056,90.82 74.168,90.932 79.502,90.932 ; v1(76.327,72.009) 76.327,70.358 76.454,70.231 78.359,70.231 79.121,70.993 89.027,70.993 ; U1.18 77.506,77.76 77.724,77.978 ; U5.18 U5.17 U5.16 U5.15 82.163,88.271 81.661,88.773 81.661,89.281 81.61,89.332 79.959,89.332 79.502,89.789 79.502,90.678 79.502,91.313 79.553,91.364 88.214,91.364 88.773,90.805 v1(96.647,90.805) 100.33,90.805 100.584,90.551 v1(100.584,86.487) 101.092,85.979 101.092,82.169 v1(100.838,81.915) ; U2.50 89.841,71.172 89.662,70.993 89.027,70.993 ; 77.724,77.978 78.74,77.978 79.121,77.597 79.121,76.327 79.248,76.2 80.264,76.2 80.391,76.073 80.391,75.438 80.891,75.438 C1.1 C2.1 83.193,75.43 84.522,74.101 U2.48 88.459,74.101 88.9,73.66 88.9,71.12 89.027,70.993
  Bottom Layer w0.254: C31.2 66.548,75.438 66.675,75.311 ; v1(66.167,74.168) 66.175,74.16 C32.2 ; v1(76.327,72.009) 76.195,72.141 U6.5 74.036,72.141 73.787,72.39 73.787,75.057 73.533,75.311 70.104,75.311 69.85,75.057 C34.2 C33.2 C32.2 ; J1.9 82.701,79.605 83.185,79.121 83.693,79.121 83.947,78.867 v1(83.947,74.676) ; v1(96.647,90.805) 88.773,90.805 88.214,91.364 63.551,91.364 62.471,90.284 62.471,81.166 62.484,81.153 62.484,78.613 63.746,77.351 63.746,76.716 66.667,76.716 66.675,76.708 66.675,75.311 ; U3.7 98.183,85.332 98.425,85.09 99.441,85.09 100.592,86.241 C20.2 C19.2 C18.2 ; U3.18 98.677,82.929 99.088,83.34 U3.15 100.607,82.146 v1(100.838,81.915) 100.838,81.153 101.6,80.391 101.6,73.914 100.076,72.39 P1.1 ; 66.675,75.311 67.183,74.803 C32.2
VREF_ADC: C11.2 C12.2 P1.6 U2.24 | length 36.9
  Top Layer w0.152: v1(88.646,68.072) 88.646,67.183 88.9,66.929 98.679,66.929 98.679,72.39 97.815,73.254 97.815,73.268 97.169,73.914 95.885,73.914 95.885,74.295 93.341,76.839 U2.24 93.341,84.705 94.107,85.471 94.107,86.106 94.242,86.241 C11.2 C12.2
  Bottom Layer w0.152: P1.6 88.519,67.945 v1(88.646,68.072)
pads on no net: J1.19 J1.21 J1.23 J1.25 J2. S1. U1.1 U1.2 U1.3 U1.5 U1.6 U1.7 U1.8 U1.12 U1.13 U1.15 U1.16 U1.17 U1.21 U1.29 U1.31 U1.35 U1.42 U1.43 U1.44 U1.45 U1.54 U1.55 U1.56 U1.57 U1.58 U1.59 U1.64 U1.72 U1.73 U1.74 U1.75 U1.77 U1.78 U1.79 U1.80 U2.27 U2.29 U2.60 U5.1 U5.10 U6.4 U7.4
copper on no net:
  other v2: 65.786,70.993 68.834,70.993

## Keep-outs
Keep-Out Layer:
  the board outline again, w0.254

## Silkscreen, mask and mechanical layers (free items; w line width, h text height)
Top Overlay:
  circle w0.051: c104.006,75.503 r0.076
  lines w0.076: 102.889,75.408 103.041,75.368 ; 103.067,75.488 103.041,75.368 ; 103.092,74.944 103.244,74.794 ; 103.244,76.192 103.244,74.791 103.397,74.944 ; 103.244,76.214 104.565,76.214 ; 103.397,75.558 ccw(c103.18,75.537) 103.041,75.368 ; 103.651,75.924 103.625,76.064 ; 103.727,76.094 103.625,76.064 ; 103.803,75.486 ccw(c104.033,75.502) 104.184,75.676 ; 103.803,76.424 cw(c103.789,76.207) 103.625,76.064 ; 104.133,75.556 104.184,75.676 ; 104.326,75.636 104.184,75.676 ; 104.413,76.064 104.565,76.214 ; 104.413,76.364 104.565,76.214
  lines w0.1: 65.151,67.31 65.024,67.437 ; 65.151,67.564 65.024,67.437 ; 69.215,67.31 69.342,67.437 ; 69.215,67.564 69.342,67.437 ; 77.724,73.914 77.597,74.041 ; 77.724,74.168 77.597,74.041 ; 77.851,73.787 77.851,74.041 77.597,74.041 ; 65.024,67.437 69.342,67.437
  lines w0.15: 63.5,68.199 71.12,68.199 71.12,73.152 63.5,73.152 63.5,68.199 ; 67.691,76.962 79.756,76.962 79.756,88.9 67.691,88.9 67.691,76.962 ; 88.011,72.771 98.171,72.771 98.171,82.931 88.011,82.931 88.011,72.771
  lines w0.254: 103.886,67.31 103.886,67.183 ; 103.886,73.406 103.886,67.183 ; 104.267,67.564 103.505,67.564 103.886,67.183 ; 103.886,67.183 104.648,67.945 103.124,67.945 103.886,67.183 ; 103.505,67.818 104.267,67.818 103.886,67.437 103.505,67.818
  text "8 channels + 9 DoF-IMU" at 102.87,90.932 h1.2 r270
  text "Wireless sEMG Module" at 104.013,90.932 h1.2 r270
  text "*" at 87.503,85.598 h0.6
  text "*" at 66.802,76.454 h0.6
  text "Y" at 104.641,76.064 h0.76
  text "Z" at 104.895,75.429 h0.76 r180
  text "X" at 103.498,74.667 h0.76 r180
  text "Body Ref." at 76.2,73.279 h0.8
  text "VREF" at 86.487,69.469 h0.76
  text "CLK / AFE" at 89.154,69.469 h0.76
  text "AGND" at 91.44,69.469 h0.76
  text "VDD" at 94.107,69.469 h0.76
  text "GND" at 96.647,69.469 h0.76
  text "VDD" at 99.441,69.469 h0.76
  text "V1_012018" at 62.865,68.58 h0.8 r90
  text "ON" at 63.5,67.183 h0.8
  text "OFF" at 69.723,67.183 h0.8
Bottom Overlay:
  lines w0.15: 96.647,82.423 100.711,82.423 100.711,86.233 96.647,86.233 96.647,82.423
  lines w0.254: 103.886,69.723 103.886,67.183 ; 103.886,67.183 104.267,67.564 103.505,67.564 103.886,67.183

## Dimensions
106.553,91.948 to 106.553,66.421 on Mechanical 14
61.722,91.948 to 106.553,91.948 on Mechanical 14

## Text inside footprints (layer, text, board x,y; h text height)
U2: Top Overlay "*" at 100.178,73.47 h0.5 r180
U5: Mechanical 16 "X" at 84.076,87.844 h0.5 r180; Mechanical 16 "Y" at 85.142,89.021 h0.5 r180; Mechanical 16 "Z" at 85.314,88.17 h0.5 r180